# Altium PCB Motor_Control.PcbDoc
Units mil, origin at the board's own origin, x right, y up, seen from the top; angles counter-clockwise.
Board outline 3500 x 2300 mil, 2 copper layers (Top Layer, Bottom Layer); 23 components, 20 nets, 88 pads, 66 vias.
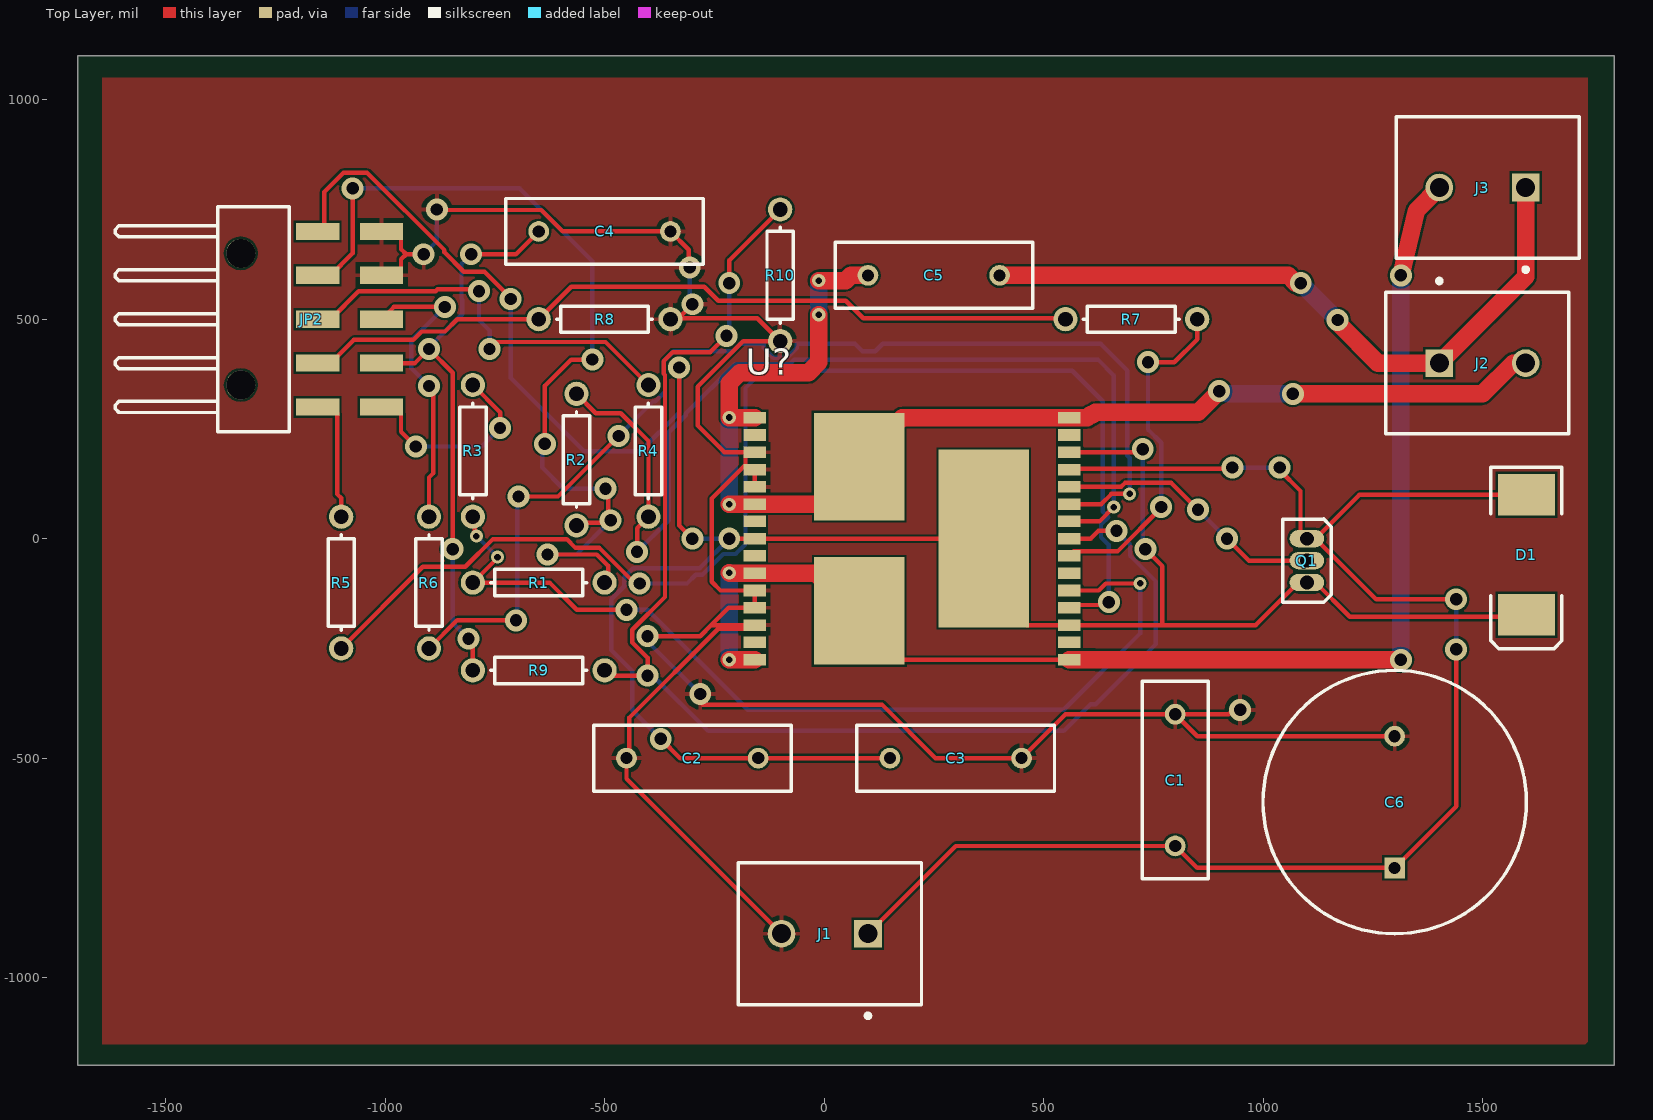
[diagram p0: Top Layer view]
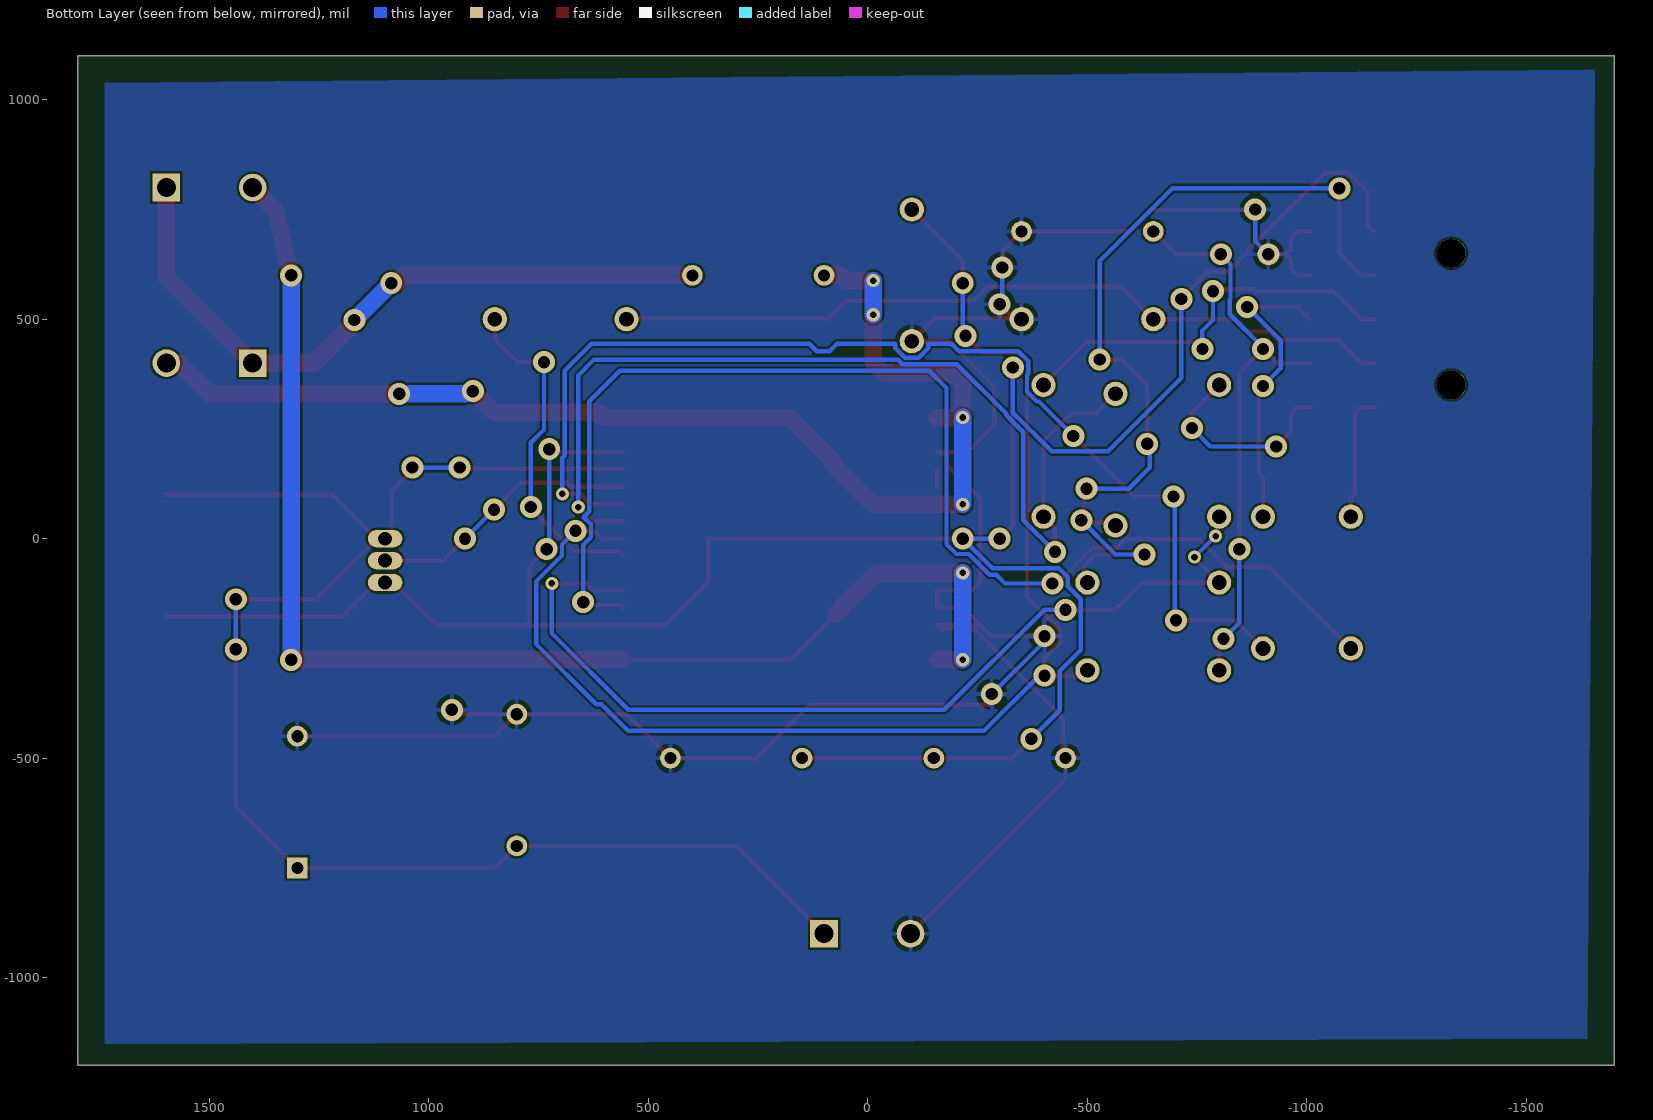
[diagram p1: Bottom Layer view, seen from below]

## Layer stack, top to bottom
Top Solder: solder mask 0.4, Solder Resist, Dk 3.5
Top Layer: signal copper 1.4
Dielectric 1: dielectric 12.6, FR-4, Dk 4.8
Bottom Layer: signal copper 1.4
Bottom Solder: solder mask 0.4, Solder Resist, Dk 3.5

## Board outline
-1700,-1200 -1700,1100 1800,1100 1800,-1200

## Design rules (kind name [scope] priority, off if disabled: settings)
Clearance [InNetClass('All Nets')] p1: gap=5 ignorepadtopadclearanceinfootprint=FALSE
FabricationTestPointUsage TestPointUsage [All] p1: valid=0 allowmultiple=FALSE
FabricationTestpoint Testpoint [All] p1: side=3 testpointundercomponent=TRUE minsize=40 maxsize=100 preferedsize=60 minholesize=20 maxholesize=40 preferedholesize=32 testpointgrid=1 allowsidetop=TRUE allowsidebottom=TRUE usegrid=TRUE gridtolerance=0.01
HoleSize [All] p1: absolutevalues=TRUE maxlimit=247 minlimit=10 maxpercent=80.000 minpercent=20.000
MinimumSolderMaskSliver [All] p1 off: minsoldermaskwidth=10
PasteMaskExpansion PasteMaskExpansion_1 [InComponent('P1')] p1: expansion=-150
PasteMaskExpansion [All] p2: expansion=0
PlaneClearance [All] p1: clearance=5
PlaneConnect [All] p1: planeconnectstyle=Relief reliefexpansion=15 reliefentries=4 reliefconductorwidth=10 reliefairgap=10
PolygonConnect [All] p1: connectstyle=Relief reliefconductorwidth=10 reliefentries=4 polygonreliefangle="90 Angle" airgapwidth=10
RoutingVias [All] p1: holewidth=15 width=30 viastyle="Through Hole" minholewidth=10 minwidth=20 maxholewidth=15 maxwidth=50
SilkToSilkClearance [All] p1 off: silktosilkclearance=10
SilkToSolderMaskClearance SilkscreenOverComponentPads [IsPad] p1 off: minsilkscreentomaskgap=10 clearancetoexposedcopper=TRUE
SolderMaskExpansion [All] p1: expansion=5
UnRoutedNet [All] p1: checkbadconnections=TRUE
Width [All] p1: maxlimit=150 minlimit=5 preferedwidth=10
20 further rules are at their usual default settings.

## Components (designator, comment, footprint, x,y, rotation, side; value= is the part's Value field where it differs from the comment)
C1 "" RAD-0.3 800,-550 r270 top value=0.1uF
C2 "" RAD-0.3 -300,-500 r0 top value=47uF
C3 "" RAD-0.3 300,-500 r180 top value=0.1uF
C4 "" RAD-0.3 -500,700 r180 top value=33nF
C5 "" RAD-0.3 250,600 r0 top value=20nF
C6 "Cap Pol1" RB7.6-15 1300,-600 r270 top value=750uF
D1 "Diode" SMC 1600,-36.81 r270 top
J1 "282836-2" TECO-282836-2_V 1.57,-900 r180 top
J2 "282836-2" TECO-282836-2_V 1500,400 r0 top
J3 "282836-2" TECO-282836-2_V 1500,800 r180 top
JP2 "610110249121" 610110249121 -1300,500 r270 top
Q1 "MOSFET-N" E3 1100,-50 r180 top
R1 "" AXIAL-0.3 -650,-100 r180 top value=4.7k
R2 "" AXIAL-0.3 -564,180 r90 top value=4.7k
R3 "" AXIAL-0.3 -800,200 r90 top value=1K
R4 "" AXIAL-0.3 -400,200 r90 top value=1K
R5 "" AXIAL-0.3 -1100,-100 r270 top value=1K
R6 "" AXIAL-0.3 -900,-100 r270 top value=1K
R7 "" AXIAL-0.3 700,500 r180 top value=1K
R8 "" AXIAL-0.3 -500,500 r0 top value=10k
R9 "" AXIAL-0.3 -650,-300 r0 top value=10k
R10 "" AXIAL-0.3 -100,600 r270 top value=1k
U? "H-Bridge-Motor-Driver" H-Bridge-Motor-Driver 200,0 r90 top

## Footprints (in the part's own frame and the unit in brackets; to place one, negate y for a bottom-side part, rotate by r counter-clockwise, add the part's x,y. Pads: shape width x height; smd on the part's side, far side on the other; paste and mask are expansions set on the pad)
610110249121 [mm] "Pin Header, pitch 2.54 mm, SMD, Angled, dual row, 10p"
  rect 1x2.5 smd: 1(5.08,3.72) 2(5.08,7.42) 3(2.54,3.72) 4(2.54,7.42) 5(0,3.72) 6(0,7.42) 7(-2.54,3.72) 8(-2.54,7.42) 9(-5.08,3.72) 10(-5.08,7.42)
  round 1.68 hole 1.68 unplated: MH1(3.81,-0.73) MH2(-3.81,-0.73)
  silkscreen extent -6.5,-8 6.5,2.07, body extent -6.35,-8 6.35,8.16, height 5.1
AXIAL-0.3 [mm] "Axial Device, Thru-Hole; 2 Leads; 0.3 in Pin Spacing"
  round 1.4 hole 0.85: 1(-3.81,0) 2(3.81,0)
  silkscreen extent -2.77,-0.76 2.77,0.76
E3 [mm] "TO, Flat Index; 3 In-Line, Axial Leads; Body Dia. 4.6mm; Lead Dia. 0.5 mm (max)"
  oval 2x1 hole 0.8: 1(0,1.27) 2(0,0) 3(0,-1.27)
  silkscreen extent -1.41,-2.41 1.41,2.41
H-Bridge-Motor-Driver [mm]
  rect 0.67x1.3 smd: CP(3,-9.1) CS(0,-9.1) CS_DIS(-2,-9.1) ENA/DIAGA(-3,-9.1) ENB/DIAGB(1,-9.1) GNDA(-5,9.1) GNDA(-4,9.1) GNDA(-3,9.1) GNDB(3,9.1) GNDB(4,9.1) GNDB(5,9.1) INA(-4,-9.1) INB(2,-9.1) NC(-6,9.1) NC(-6,-9.1) NC(-1,9.1) NC(1,9.1) NC(6,9.1) NC(6,-9.1) OUTA(-7,-9.1) OUTA(-7,9.1) OUTA(-2,9.1) OUTB(2,9.1) OUTB(7,-9.1) OUTB(7,9.1) PWM(-1,-9.1) VBAT(4,-9.1) VCC(-5,-9.1) VCC(0,9.1) VCC(5,-9.1)
  rect 6.23x5.25 smd: OUTA(-4.165,3.05) OUTB(4.165,3.05)
  rect 10.3x5.25 smd: VCC(0,-4.165)
  body extent -8.6,-8 8.6,8, height 2.35
RAD-0.3 [mm] "Radial Cap, Thru-Hole; 2 Leads; 0.3 in Pin Spacing"
  round 1.2 hole 0.7: 1(-3.81,0) 2(3.81,0)
  silkscreen extent -5.71,-1.91 5.71,1.91
RB7.6-15 [mm] "Polarized Capacitor (Radial); 2 Leads"
  rect 1.2x1.2 hole 0.7: 1(3.81,0)
  round 1.2 hole 0.7: 2(-3.81,0)
  silkscreen extent -7.62,-7.62 7.62,7.62
SMC [mm] "DO-214-AB/SMC; 2 C-Bend Leads; Body 7.9 x 5.9 mm, inc. leads (LxW)"
  rect 2.4x3.3 smd: 1(-3.475,0) 2(3.475,0)
  silkscreen extent -5.07,-2.05 5.43,2.06
TECO-282836-2_V [mm] "Female Header, Pitch 5mm, 1 x 2 Position, Height 10mm"
  rect 1.6x1.6 hole 1.1: 1(-2.5,0)
  round 1.6 hole 1.1: 2(2.5,0)
  silkscreen extent -5.6,-4.1 5,4.87, body extent -5.6,-4.1 5,4.1, height 10

## Part data
C1 C2 C3 C4 C5: library part Cap, "Capacitor", LatestRevisionDate=17-Jul-2002, LatestRevisionNote="Re-released for DXP Platform.", PackageDescription="Radial Cap, Thru-Hole; 2 Leads; 0.3 in Pin Spacing", PackageReference=RAD-0.3, Published=8-Jun-2000, Publisher="Altium Limited"
C6: "Polarized Capacitor (Radial)", LatestRevisionDate=17-Jul-2002, LatestRevisionNote="Re-released for DXP Platform.", PackageDescription="Polarized Capacitor (Radial); 2 Leads", PackageReference=RB7.6-15, Published=8-Jun-2000, Publisher="Altium Limited"
D1: "Default Diode", Code_JEDEC=DO-214-AB, LatestRevisionDate=17-Jul-2002, LatestRevisionNote="Re-released for DXP Platform.", PackageDescription="DO-214-AB/SMC; 2 C-Bend Leads; Body 7.9 x 5.9 mm, inc. leads (LxW)", PackageReference=SMC, PackageVersion=Sep-1996, Published=8-Jun-2000, Publisher="Altium Limited"
J1 J2 J3: library part CMP-1684-00017-1, "Female Header, Pitch 5 mm, 1 x 2 Position, Height 10 mm, Tail Length 3.5 mm, Rohs, Bulk", Color=Green, Current=13.5A, Manufacturer="TE Connectivity", Package Description="Female Header, Pitch 5 mm, 1 x 2 Position, Height 10 mm, Tail Length 3.5 mm", Package Reference=THD, Standard Package=300, Voltage=300V, 3D Model=282836-2.pdf, Category=Connectors,Interconnects, Clamp Material - Plating=Brass-NickelPlated, Contact Material - Plating=Brass-TinPlated, Datasheet URL=http://www.te.com.cn/commerce/DocumentDelivery/DDEController?Action=showdoc&DocId=Catalog+Section%7F1308389_EUROSTYLE_TERMINAL_BLOCKS%7F0607%7Fpdf%7FEnglish%7FENG_CS_1308389_EUROSTYLE_TERMINAL_BLOCKS_0607.pdf%7F282836-2, Dynamic Catalog=BuchananSeries, Family=TerminalBlocks-WiretoBoard, Featured Product=EurostyleTerminalBlockConnectors, Features=Interlocking(Side), Housing Material=Polyamide(PA66),Nylon6/6, Manufacturer URL=http://www.te.com, Mating Orientation=HorizontalwithBoard, Mounting Type=ThroughHole, Number of Levels=1, Other Names="5ULV-02B / A98076", Packaging=Bulk, Pitch="0.197\"(5.00mm)", Positions Per Level=2, Product Training Modules=Wire-to-BoardEurostyleTerminalBlocks, RoHS Information=282836-2StatementofCompliance, Screw Material - Plating=Brass-NickelPlated, Screw Thread=M3, Series=Buchanan, Torque - Screw=0.68Nm(6Lb-In), Wire Gauge=16-30AWG, Wire Termination=Screw-RisingCageClamp
JP2: library part CMP-1502-01148-1, "SMT Angled Pin Header WR-PHD, Pitch 2.54 mm, Dual Row, 10 pins", Contact Resistance=20mOhm, Manufacturer="Wurth Elektronik", Operating Temperature=-40to105degC, Rated Current=3A, Withstanding Voltage=600VAC, Working Voltage=250VAC, Datasheet URL=https://katalog.we-online.de/em/datasheet/6101xx249121.pdf, Gender=Male, Manufacturer URL=http://www.we-online.de, Mounting Technology=SMT, Orientation=Angled, Package Reference=610110249121, Packaging=TapeandReel, Part Number=610110249121, Pin Number=10, Pitch=2.54mm, Publisher=WurthElektronik, Row Number=Dual
Q1: "N-Channel MOSFET", LatestRevisionDate=17-Jul-2002, LatestRevisionNote="Re-released for DXP Platform.", PackageDescription="TO, Flat Index; 3 In-Line, Axial Leads; Body Dia. 4.6mm; Lead Dia. 0.5 mm (max)", PackageReference=E3, PackageVersion=1995/1996, Published=8-Jun-2000, Publisher="Altium Limited"
R1 R2 R3 R4 R5 R6 R7 R8 R9 R10: library part Res1, "Resistor", LatestRevisionDate=17-Jul-2002, LatestRevisionNote="Re-released for DXP Platform.", PackageDescription="Axial Device, Thru-Hole; 2 Leads; 0.3 in Pin Spacing", PackageReference=AXIAL-0.3, Published=8-Jun-2000, Publisher="Altium Limited"
U?: "The VHN5019A-E is a full bridge motor driver / intended for a wide range of automotive / applications. The device incorporates a dual / monolithic high-side drivers and two low-side / switches."

## Via types
v1: diameter 50, hole 28, Top Layer to Bottom Layer, 55 vias
v2: diameter 30, hole 15, Top Layer to Bottom Layer, 11 vias

## Nets (pads, with @x,y where several pads share a name; then routed paths per layer and width w, separated by ;. In a path a pad name is that pad's centre, name@x,y a point inside that pad or via, vN(x,y) a via of type N, cw(c..) or ccw(c..) an arc to the next point about the centre after c; other vN are vias at no path point)
CP: Q1.2 U?.CP | length 618.7
  Top Layer w10: U?.CP 676.75,118.11 685.64,127 791,127 v1(852,66) ; v1(918,0) 968,-50 Q1.2
  Bottom Layer w10: v1(852,66) v1(918,0)
CS: R9.2 R10.1 U?.CS | length 3073.9
  Top Layer w10: R9.2 -488,-312 v1(-402,-312) -402,-271.5 -437,-236.5 -437,-207.5 -362.44,-132.94 -362.44,372.94 -365,375.5 -365,404.5 -344.5,425 -259,425 v1(-222,462) ; v1(-216,582) -216,634 R10.1 ; U?.CS 607.18,0 625.18,18 v1(666,18)
  Bottom Layer w10: v1(-402,-312) -390,-312 -264,-438 546,-438 607,-377 619,-377 756,-240 756,-97.5 697,-38.5 697,-13 v1(666,18) ; v1(-222,462) -216,468 v1(-216,582)
ENA: JP2.2 R3.2 | length 472.6
  Top Layer w10: JP2.2 -978.35,300 -963.66,285.31 -963.66,243.66 v1(-930,210) ; R3.2 -738,288 v1(-738,252)
  Bottom Layer w10: v1(-930,210) -780,210 v1(-738,252)
ENB: JP2.5 R4.2 | length 948.5
  Top Layer w10: JP2.5 -1124.02,500 -1060.02,564 -884.57,564 -880.57,568 -790,568 v1(-786,564) ; v1(-762,432) -746,448 -498,448 R4.2
  Bottom Layer w10: v1(-786,564) -786,498 -762,474 v1(-762,432)
GND: C1.1 C2.1 C3.1 C4.1 C6.2 J1.2 JP2.8 JP2.10 R8.2 R10.2 U?.GNDA U?.GNDB | length 5829.9
  Top Layer w10: JP2.8 -978.35,600 -963.66,614.69 -963.66,636.34 -952,648 ; JP2.10 -978.35,700 -963.66,685.31 -963.66,659.66 -952,648 ; v1(-912,648) -952,648 ; v1(-882,750) -880.83,748.83 -644.21,748.83 -595.38,700 C4.1 -308,658 -308,620 v1(-306,618) ; v1(-402,-222) -282,-222 -256.85,-196.85 ; R8.2 R8.2@-348,502 ; v1(-300,534) -328.28,505.72 -344.28,505.72 R8.2@-348,502 ; v1(-282,-354) -276.14,-359.86 -276.14,-378 132,-378 254,-500 C3.1 550,-400 C1.1 ; U?.GNDB@-158.27,118.11 U?.GNDB@-158.27,157.48 ; U?.GNDB@-158.27,196.85 U?.GNDB@-170.67,196.85 ; J1.2 -450,-546.85 C2.1 -443.42,-493.42 -443.42,-407.42 -241.04,-205.04 -166.46,-205.04 -158.27,-196.85 -256.85,-196.85 ; v1(948,-390) 940.35,-397.65 924.35,-397.65 922,-400 C1.1 ; C6.2 850,-450 C1.1 ; R8.2@-348,502 -152,502 R10.2 -184.5,450 -288,346.5 -288,257.86 -226.99,196.85 U?.GNDB@-170.67,196.85 ; -256.85,-196.85 -217.48,-157.48 -158.27,-157.48 -158.27,-118.11 -235.89,-118.11 -256,-98 -256,91.52 -178.86,168.66 -178.86,188.66 U?.GNDB@-170.67,196.85
  Bottom Layer w10: v1(-912,648) -882,678 v1(-882,750) ; v1(-402,-222) -402,-234 v1(-282,-354) ; v1(-306,618) -306,540 v1(-300,534)
INA: JP2.1 R5.1 | length 289.5
  Top Layer w10: JP2.1 -1124.02,300 -1109.33,285.31 -1109.33,101.89 -1100,92.56 R5.1
INTA: J3.2 U?.OUTA | length 2977.3
  Top Layer w10: U?.OUTA@73.59,-172.57 176.6,-275.59 U?.OUTA@558.27,-275.59
  Top Layer w40: v2(-216,-276) -215.8,-275.8 -158.47,-275.8 U?.OUTA@-158.27,-275.59 ; v2(-216,-78) -215.26,-78.74 -158.27,-78.74 -18.42,-78.74 61.92,-159.09 61.92,-163.98 U?.OUTA@73.59,-172.57 ; U?.OUTA@558.27,-275.59 617.59,-275.59 618,-276 v1(1314,-276) v1@1319.59,-275.59 ; v1(1314,600) 1350,748.43 J3.2
  Bottom Layer w40: v2(-216,-276) v2(-216,-78) ; v1(1314,-276) v1(1314,600)
NetC4_2: C4.2 JP2.4 R9.1 | length 1327.5
  Top Layer w10: JP2.4 -932,400 v1(-900,432) -846,378 v1(-846,-24) ; v1(-810,-228) -810,-240 -800,-250 R9.1 ; v1(-804,648) -702,648 C4.2
  Bottom Layer w10: v1(-900,432) -900,435.43 -824,511.43 -824,544.57 -826,546.57 -826,626 v1(-804,648) ; v1(-846,-24) -846,-192 v1(-810,-228)
NetJP2_6: JP2.6 R6.1 | length 689.8
  Top Layer w10: JP2.6 -979.87,528 v1(-864,528) ; R6.1 -900,139.39 -890,149.39 -890,327.18 -900,337.18 v1(-900,348)
  Bottom Layer w10: v1(-900,348) -940,388 -940,452 v1(-864,528)
NetR1_2: R1.2 R3.1 U?.ENA/DIAGA | length 2191
  Top Layer w10: R3.1 -795.83,45.83 -795.83,9.83 v2(-792,6) ; v2(-744,-42) -744,-44 R1.2 -625.31,-100 -563.31,-162 v1(-450,-162) ; U?.ENA/DIAGA 625.68,-118.11 641.79,-102 v2(720,-102)
  Bottom Layer w10: v2(-792,6) v2(-744,-42) ; v1(-450,-162) -402,-162 -174,-390 546,-390 720,-216 v2(720,-102)
NetR2_2: R2.2 R4.1 U?.ENB/DIAGB | length 2288.9
  Top Layer w10: R2.2 -519.97,285.97 -463.4,285.97 -400,222.57 R4.1 -426,24 v1(-426,-30) ; U?.ENB/DIAGB 627.37,39.37 v2(660,72)
  Bottom Layer w10: v1(-426,-30) -354,42 -354,242.44 -315,281.44 -315,285 -202.56,397.44 -78.23,397.44 -67.67,408 624,408 660,372 v2(660,72)
NetR5_2: R5.2 U?.INA | length 2890.4
  Top Layer w10: R5.2 -914,-64 -817.12,-64 -754.12,-1 -586.12,-1 -566.12,-21 -511.74,-21 -430.74,-102 v1(-420,-102) ; U?.INA 564.69,-151.06 642.23,-151.06 v1(648.65,-144.65)
  Bottom Layer w10: v1(-420,-102) -312.26,-102 -292.26,-82 -276.79,-82 -229.79,-35 -201.5,-35 -179,-12.5 -179,343 -139.56,382.44 565.56,382.44 635,313 635,61.64 647.57,49.07 631,32.5 631,3.5 648.65,-14.14 v1(648.65,-144.65)
NetR6_2: R6.2 U?.INB | length 2591.9
  Top Layer w10: R6.2 -836,-186 v1(-702,-186) ; v1(-696,96) -606,96 v1(-468,234) ; U?.INB 631.38,78.74 654.64,102 v2(696,102)
  Bottom Layer w10: v1(-702,-186) -699,-183 -699,93 v1(-696,96) ; v1(-468,234) -389.56,312.44 -384.44,312.44 -362.44,334.44 -362.44,372.94 -365,375.5 -365,404.5 -342.5,427 -207.5,427 -190.5,444 -137.56,444 -137.56,434.44 -115.56,412.44 -84.44,412.44 -62.44,434.44 -62.44,444 70.5,444 87.5,427 116.5,427 133.5,444 630,444 691,383 691,189.5 696,184.5 v2(696,102)
NetR7_1: R7.1 U?.PWM | length 778.7
  Top Layer w10: U?.PWM 568.64,-29 668.5,-29 768,70.5 v1(768,72) ; v1(738,402) 798.05,402 850,453.95 R7.1
  Bottom Layer w10: v1(738,402) 738,248.57 768,218.57 v1(768,72)
OUTA: C5.2 J2.1 J3.1 | length 1569.5
  Top Layer w40: C5.2 1057.18,600 1075.18,582 v1(1086,582) ; v1(1170,498) 1170,492 1262,400 J2.1 1598.43,596.85 J3.1
  Bottom Layer w40: v1(1086,582) v1(1170,498)
OUTB: C5.1 J2.2 U?.OUTB | length 2799.8
  Top Layer w40: v2(-216,78) -203.63,78.37 -158.64,78.37 -158.27,78.74 -11.95,78.74 79.92,170.61 79.92,177.24 178.27,275.59 558.27,275.59 599.59,275.59 606,282 612,282 618,288 852,288 v1(900,336) ; U?.OUTB@-158.27,275.59 -203.59,275.59 v2(-216,276) -216,354 -192,378 -35.43,378 -12,401.43 v2(-12,510) ; v2(-12,588) 49.38,588 61.38,600 C5.1 C5.1@102,598 ; v1(1068,330) 1500,330 1570,400 J2.2
  Bottom Layer w40: v2(-216,78) v2(-216,276) ; v2(-12,510) v2(-12,588) ; v1@918,330 v1(1068,330)
PWM: JP2.3 R7.2 R8.1 | length 1806.3
  Top Layer w10: JP2.3 -1124.02,400 -1071.02,453 -935.57,453 -916.57,472 -863.43,472 -835.43,500 R8.1 -576,574 -273.18,574 -241.18,542 49.43,542 89.43,502 548,502 R7.2
VBAT: C1.2 C6.1 D1.1 J1.1 Q1.3 U?.VBAT | length 3562.4
  Top Layer w10: J1.1 300,-700 C1.2 850,-750 C6.1 1440,-610 v1(1440,-252) ; U?.VBAT 560.53,159.74 927.74,159.74 v1(930,162) ; v1(1038,162) 1038,156 1085.31,108.68 1085.31,13.57 1098.88,0 Q1.3 Q1.3@1119.69,0 ; v1(1440,-138) 1257.69,-138 Q1.3@1119.69,0 ; D1.1 1219.69,100 Q1.3@1119.69,0
  Bottom Layer w10: v1(930,162) v1(1038,162) ; v1(1440,-252) v1(1440,-138)
VCC: C2.2 C3.2 D1.2 JP2.9 Q1.1 U?.VCC | length 5784.2
  Top Layer w10: JP2.9 -1138.86,714.69 -1138.86,789.71 -1094.71,833.86 -1041.29,833.86 -864.89,657.45 -864.89,652.32 -820.57,608 -773.43,608 -714,548.57 v1(-714,546) ; v1(-372,-456) -328,-500 C2.2 C3.2 ; v1(-330,390) -330,30 v1(-300,0) ; v1(-216,0) -158.27,0 363.98,0 363.98,-98.5 462.32,-196.85 558.27,-196.85 770.87,-196.85 ; U?.VCC@558.27,196.85 718.85,196.85 v1(726,204) ; v1(732,-24) 770.87,-62.87 770.87,-196.85 ; D1.2 1595.62,-178 1197.69,-178 1119.69,-100 Q1.1 1080.31,-100 983.47,-196.85 770.87,-196.85
  Bottom Layer w10: v1(-714,546) -714,366 -547,199 -418.65,199 -330,287.65 v1(-330,390) ; v1(-372,-456) -437,-391 -437,-301.59 -485,-253.59 -485,-138.12 -455,-108.12 -455,-87.5 -434.5,-67 -283,-67 v1(-216,0) v1(-300,0) ; v1(726,204) 726,-18 v1(732,-24)
VDD: JP2.7 R1.1 R2.1 | length 2120.1
  Top Layer w10: JP2.7 -1124.02,600 -1074,650.02 v1(-1074,798) ; v1(-636,216) -636,348 -576,408 v1(-528,408) ; v1(-630,-36) -517.95,-36 -492,-61.95 -492,-102 -498,-102 R1.1 ; R2.1@-580,36 -492,36 v1(-486,42) -492,48 -492,108.14 -497.86,114 v1(-498,114)
  Bottom Layer w10: v1(-1074,798) -693.38,798 -528,632.62 v1(-528,408) ; v1(-636,216) -642,210 -642,162 -594,114 v1(-498,114) ; v1(-630,-36) -564,-36 v1(-486,42)
pads on no net: JP2.MH1 JP2.MH2 U?.CS_DIS U?.NC

## Polygon pours and split planes (outlines as drawn)
GND on Bottom Layer (solid, pour order 2): -1656,1068 -1633,1068 1739,1039 1739,-1152 -1639,-1139
GND on Top Layer (solid, pour order 4): 1740,1050 1740,-1146 1734,-1152 -1644,-1152 -1644,1050

## Silkscreen, mask and mechanical layers (free items; w line width, h text height)
Board Outline:
  the board outline again, w10